# Altium PCB board_side_PCB.PcbDoc
Units mm, origin at the board's own origin, x right, y up, seen from the top; angles counter-clockwise.
Board outline 152.4 x 101.6 mm, 2 copper layers (Top Layer, Bottom Layer); 6 components, 9 nets, 24 pads, 0 vias.
Unrouted connection lines stored in the file: 3.
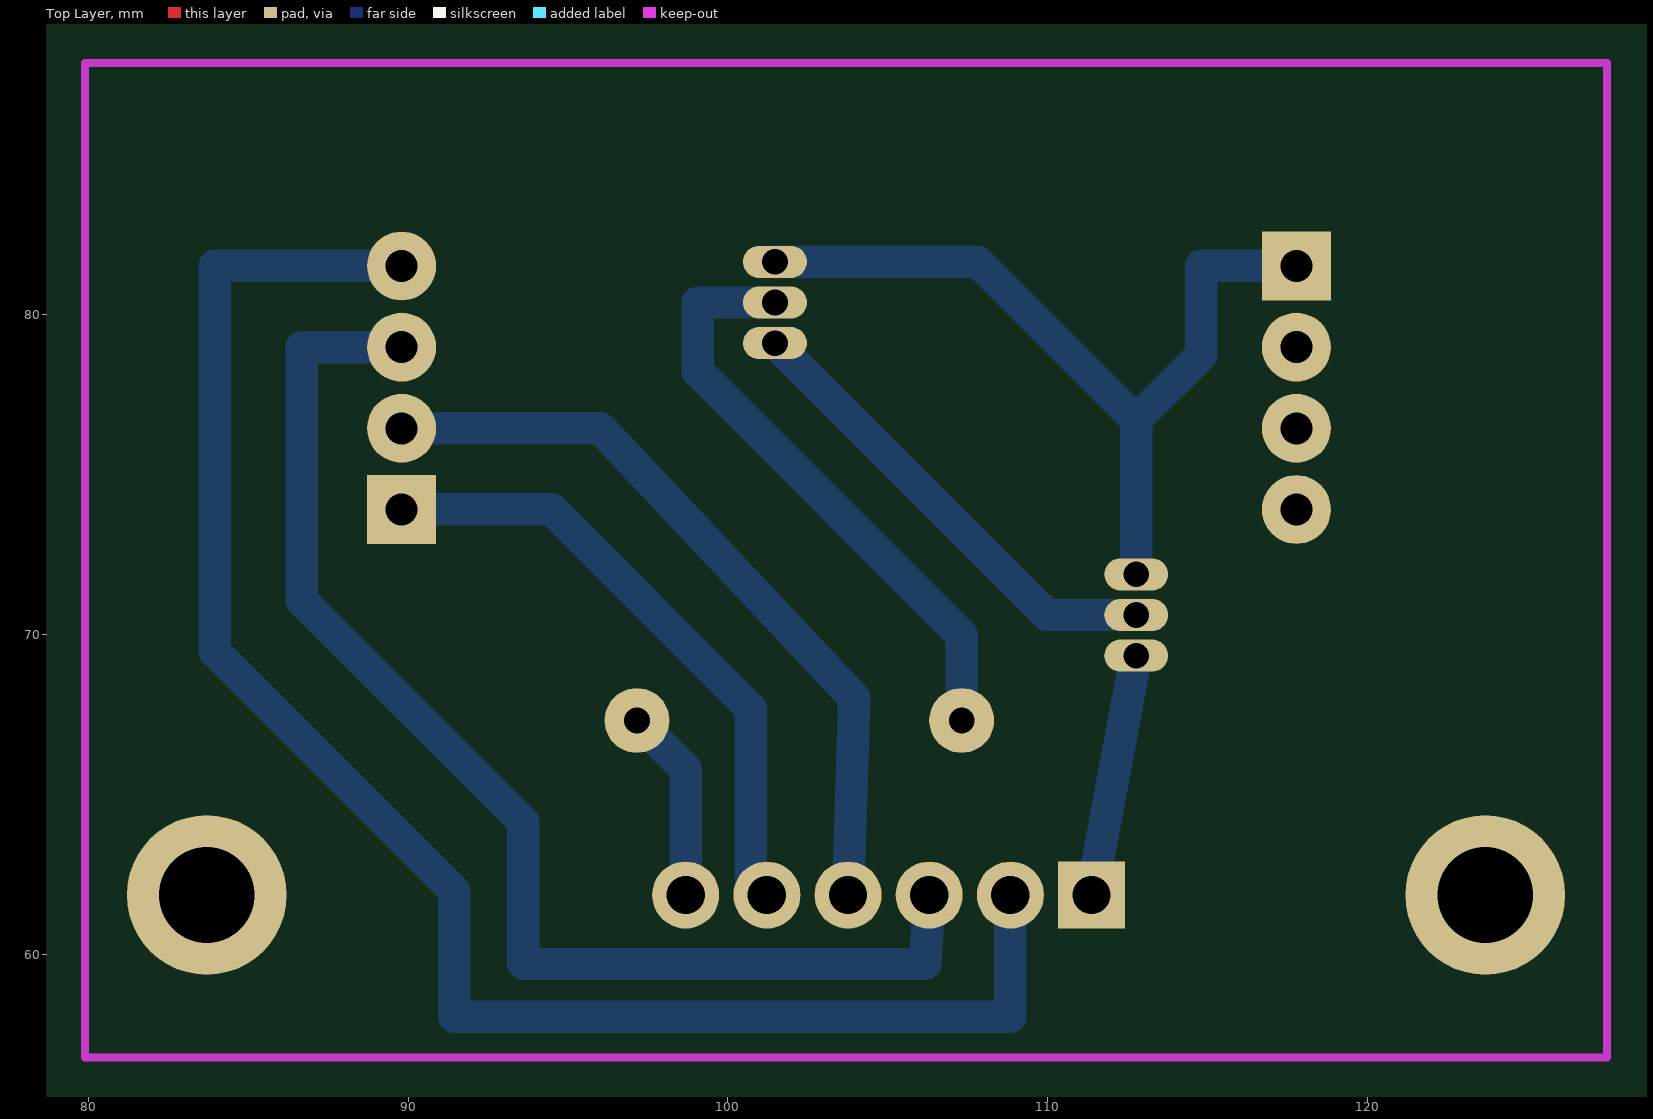
[diagram p0: Top Layer view]
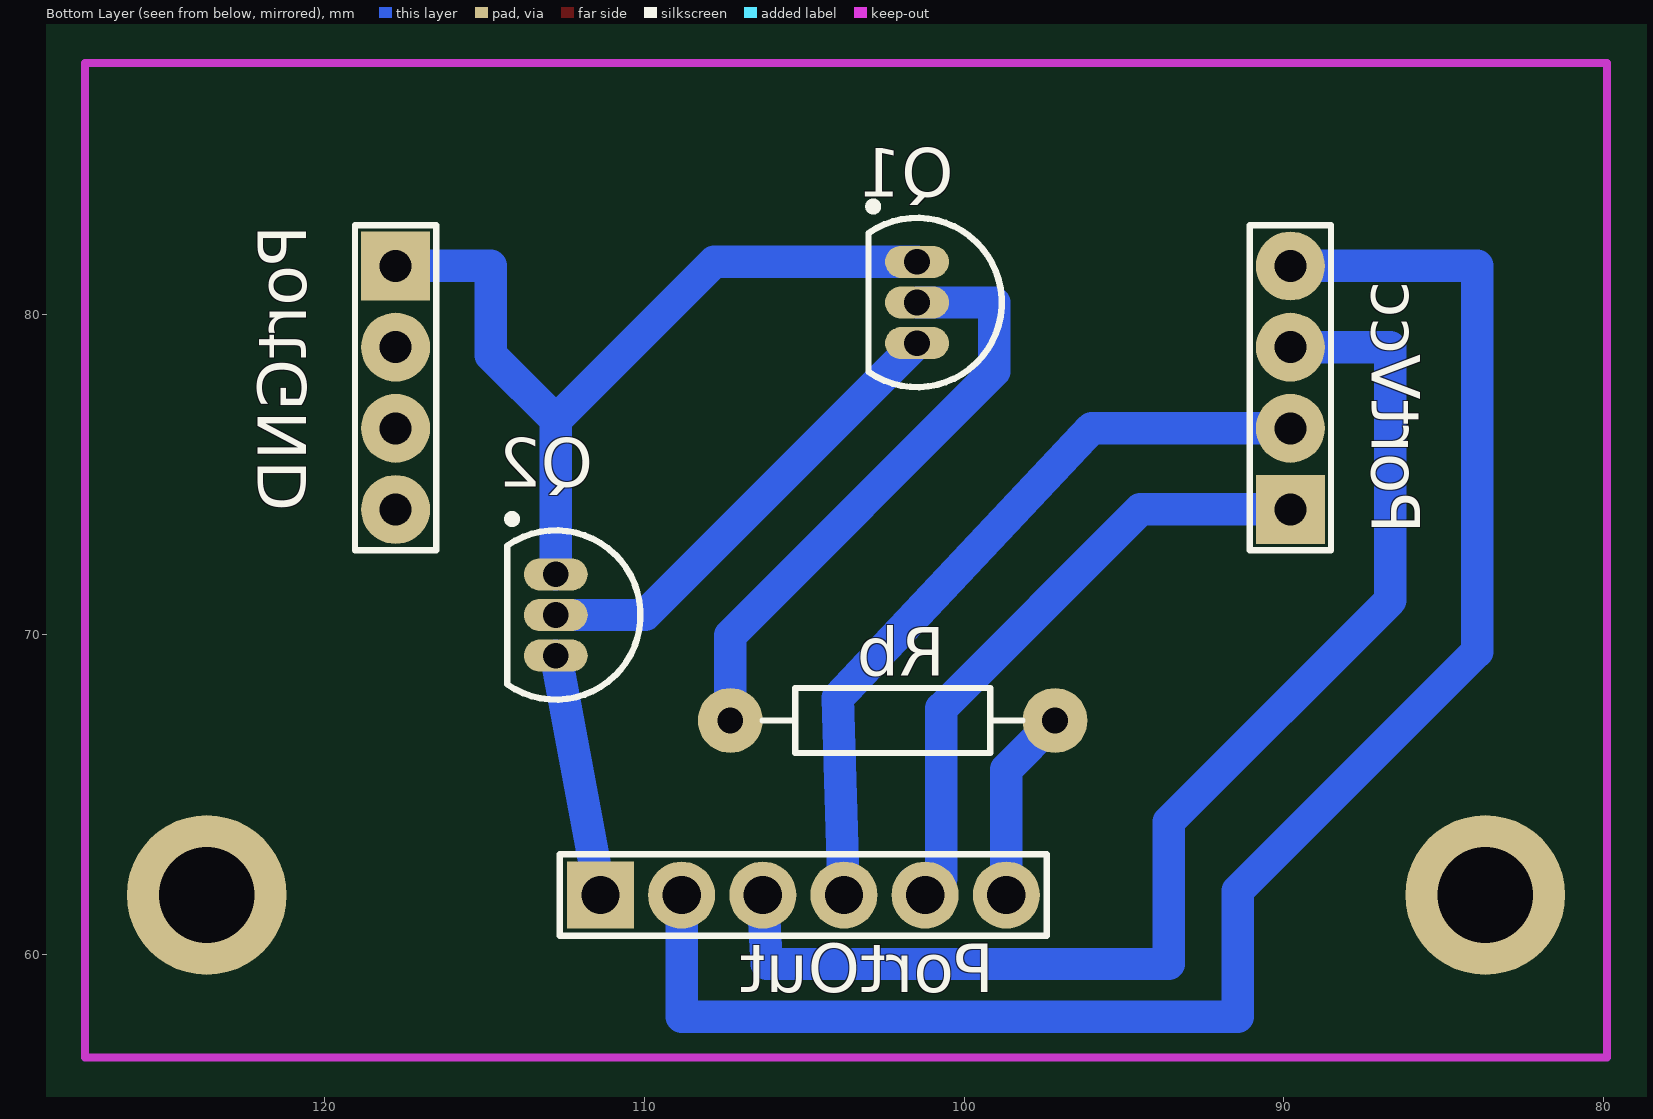
[diagram p1: Bottom Layer view, seen from below]

## Layer stack, top to bottom
Top Solder: solder mask 0.0102, Solder Resist, Dk 3.5
Top Layer: signal copper 0.0356
Dielectric 1: dielectric 0.32, FR-4, Dk 4.8
Bottom Layer: signal copper 0.0356
Bottom Solder: solder mask 0.0102, Solder Resist, Dk 3.5

## Board outline
25.4,25.4 177.8,25.4 177.8,127 25.4,127

## Design rules (kind name [scope] priority, off if disabled: settings)
Clearance [All] p1: gap=0.254 ignorepadtopadclearanceinfootprint=FALSE
PolygonConnect [All] p1: connectstyle=Relief reliefconductorwidth=0.254 reliefentries=4 polygonreliefangle="90 Angle" airgapwidth=0.254
RoomDefinition board_side [InComponentClass('board_side')] p1: confinementstyle=ConfineIn formatcopy=TRUE lockcomponents=FALSE outline 0,0 50.8,0 50.8,25.4 0,25.4
RoutingVias [All] p1: holewidth=0.711 width=1.27 viastyle="Through Hole" minholewidth=0.711 minwidth=1.27 maxholewidth=0.711 maxwidth=1.27
SolderMaskExpansion [All] p1: expansion=0.102
Width [All] p1: maxlimit=2.54 minlimit=0.254 preferedwidth=1.016 toplayer_maxwidth=0.254 toplayer_prefwidth=0.254 minimp=50.000000 maximp=50.000000 favimp=50.000000
30 further rules are at their usual default settings.

## Components (designator, comment, footprint, x,y, rotation, side; value= is the part's Value field where it differs from the comment)
PortGND "Header 4" HDR1X4 117.789,81.534 r270 bottom
PortOut "Header 6" HDR1X6 111.379,61.849 r180 bottom
PortVcc "Header 4" HDR1X4 89.789,73.914 r90 bottom
Q1 "NPN" TO-226-AA 101.473,80.391 r0 bottom
Q2 "NPN" TO-226-AA 112.776,70.612 r0 bottom
Rb "Res2" AXIAL-0.4 102.235,67.31 r0 bottom value=5.1K

## Footprints (in the part's own frame and the unit in brackets; to place one, negate y for a bottom-side part, rotate by r counter-clockwise, add the part's x,y. Pads: shape width x height; smd on the part's side, far side on the other; paste and mask are expansions set on the pad)
AXIAL-0.4 [mil] "Axial Device, Thru-Hole; 2 Leads; 0.4 in Pin Spacing"
  round 80 hole 31.5: 1(-200,0) 2(200,0)
  silkscreen extent -160,-40 160,40
HDR1X4 [mil] "Connector; Header; 4 Position"
  rect 85x85 hole 39.37: 1(0,0)
  round 85 hole 39.37: 2(100,0) 3(200,0) 4(300,0)
  silkscreen extent -50,-50 350,50
HDR1X6 [mm] "Connector; Header; 6 Position"
  rect 2.1x2.1 hole 1.2: 1(0,0)
  round 2.1 hole 1.2: 2(2.54,0) 3(5.08,0) 4(7.62,0) 5(10.16,0) 6(12.7,0)
  silkscreen extent -1.27,-1.27 13.97,1.27
TO-226-AA [mm] "TO, Flat Index; 3 In-Line, Axial Leads; Body Dia. 4.8mm; Leads 0.55 x 0.51 mm (max)"
  oval 2x1 hole 0.8: 1(0,-1.27) 2(0,0) 3(0,1.27)
  silkscreen extent -2.65,-3.13 1.52,2.65, body extent -2.65,-2.66 1.52,2.66, height 5.33

## Part data
PortGND PortVcc: "Header, 4-Pin", LatestRevisionDate=17-Jul-2002, LatestRevisionNote="Re-released for DXP Platform.", Publisher="Altium Limited"
PortOut: "Header, 6-Pin", LatestRevisionDate=17-Jul-2002, LatestRevisionNote="Re-released for DXP Platform.", Publisher="Altium Limited"
Q1 Q2: "NPN Bipolar Transistor", Code_JEDEC=TO-226-AA, LatestRevisionDate=17-Jul-2002, LatestRevisionNote="Re-released for DXP Platform.", PackageDescription="TO, Flat Index; 3 In-Line, Axial Leads; Body Dia. 4.8mm; Leads 0.55 x 0.51 mm (max)", PackageReference=TO-226-AA, Published=8-Jun-2000, Publisher="Altium Limited"
Rb: "Resistor", LatestRevisionDate=17-Jul-2002, LatestRevisionNote="Re-released for DXP Platform.", PackageDescription="Axial Device, Thru-Hole; 2 Leads; 0.4 in Pin Spacing", PackageReference=AXIAL-0.4, Published=8-Jun-2000, Publisher="Altium Limited"

## Free pads (board coordinates)
  round 5 hole 3: 6(83.693,61.849) 7(123.698,61.849)

## Nets (pads, with @x,y where several pads share a name; then routed paths per layer and width w, separated by ;. In a path a pad name is that pad's centre, name@x,y a point inside that pad or via, vN(x,y) a via of type N, cw(c..) or ccw(c..) an arc to the next point about the centre after c; other vN are vias at no path point)
GND: PortOut.1 Q2.3 | length 7.6
  Bottom Layer w1.016: PortOut.1 Q2.3
NetPortGND_1: PortGND.1 Q1.1 Q2.1 | length 26.6
  Bottom Layer w1.016: Q1.1 107.823,81.661 112.776,76.708 ; Q2.1 112.776,76.708 ; PortGND.1@117.602,81.534 114.808,81.534 114.808,78.74 112.776,76.708
NetPortOut_3: PortOut.3 PortVcc.3
NetPortOut_4: PortOut.4 PortVcc.2 | length 24
  Bottom Layer w1.016: PortVcc.2 96.012,76.454 103.947,68.019 PortOut.4
NetPortOut_5: PortOut.5 PortVcc.1 | length 0.6
  Bottom Layer w1.016: PortOut.5 PortOut.5@101.609,62.239
NetPortOut_6: PortOut.6 Rb.1 | length 5.9
  Bottom Layer w1.016: Rb.1 98.679,65.786 98.679,62.357 PortOut.6@98.933,62.103
NetQ1_2: Q1.2 Rb.2 | length 18.9
  Bottom Layer w1.016: Q1.2 99.06,80.391 99.06,78.232 107.315,69.977 Rb.2
NetQ1_3: Q1.3 Q2.2 | length 14.8
  Bottom Layer w1.016: Q1.3 109.982,70.612 Q2.2
VCC: PortOut.2 PortVcc.4
pads on no net: PortGND.2 PortGND.3 PortGND.4
copper on no net: | length 115.4
  Bottom Layer w1.016: 89.789,73.914 94.488,73.914 100.711,67.691 100.711,62.357 101.219,61.849 ; 89.789,78.994 86.665,78.994 86.665,71.069 93.599,64.135 93.599,59.69 106.172,59.69 ; 89.789,81.534 83.947,81.534 83.947,69.469 91.44,61.976 91.44,58.039 108.839,58.039 108.839,61.849 ; 106.172,59.69 106.299,61.849 106.172,59.69

## Keep-outs
Keep-Out Layer:
  lines w0.254: 79.883,56.769 127.508,56.769 127.508,87.884 79.883,87.884 79.883,56.769